# EAGLE board RHC12-BTA (EAGLE 7.5.0)
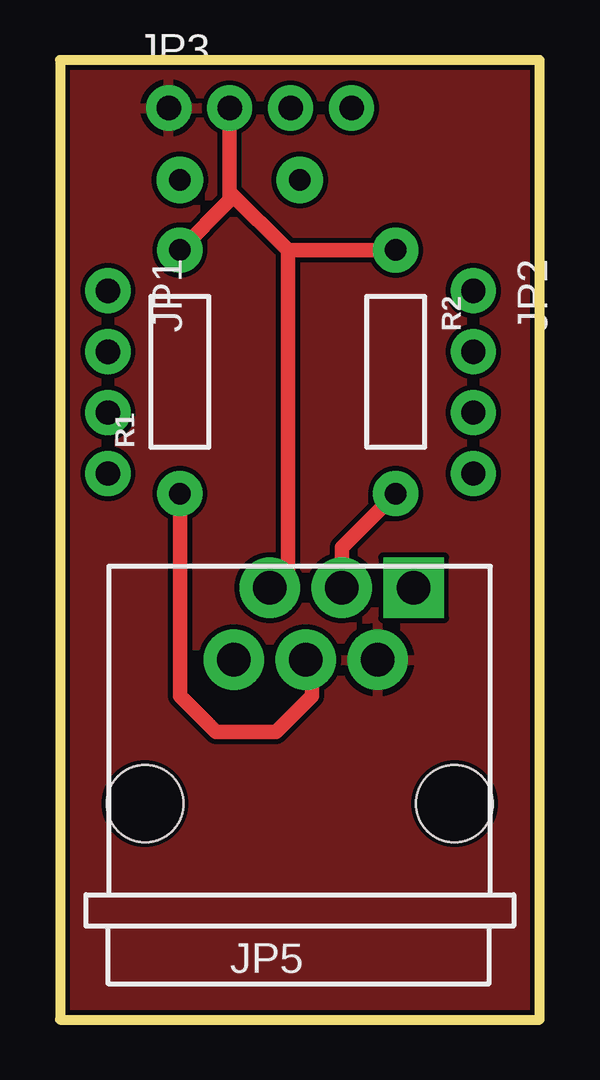
[diagram p0: board, top side]
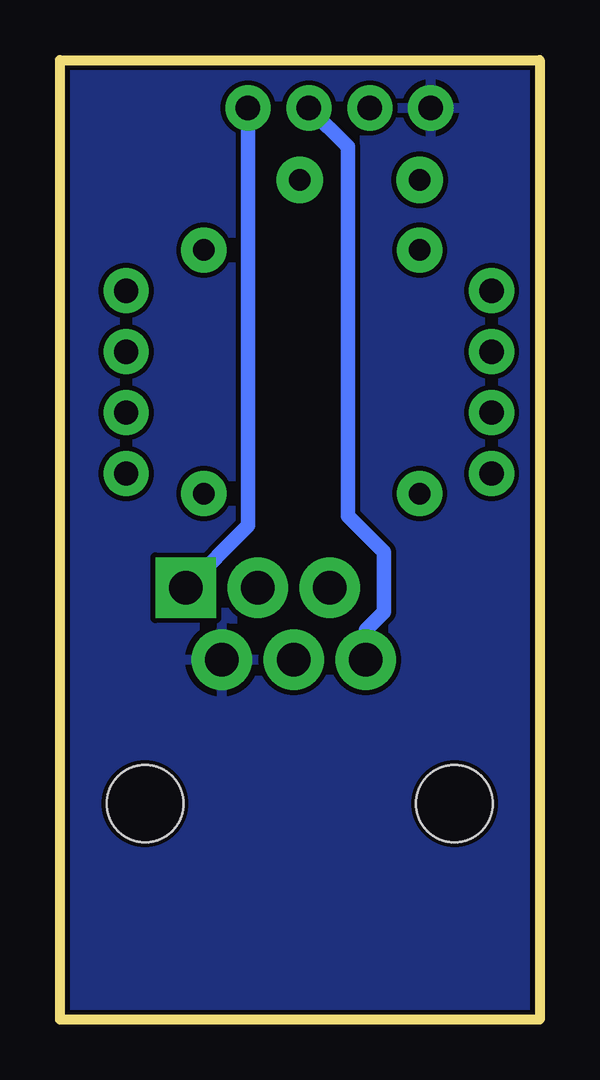
[diagram p1: board, bottom side, seen from below]

Size 20 x 40 mm. Coordinates in mm from the lower left corner, seen from the top.
Outline: 0,0 20,0 20,40 0,40 0,0
Copper layers (1*16): Top 0.035mm / dielectric 1.5mm / Bottom 0.035mm
Design rules "SparkFun-2-layer *": minimum track width 10mil, minimum drill 15mil, track to track 8mil, track to pad 8mil, pad to pad 8mil, via to via 8mil, smd to smd 8mil, copper to edge 8mil, drill to drill 8mil, minimum pad ring 12mil, minimum via ring 10mil, stop-mask expansion 4mil, vias tented up to drill 20mil, thermal gap 10mil

## Footprints (pad centres in the part's own frame; a part is rotated, then mirrored left to right if it is on the bottom)
1X04_NO_SILK_ALL_ROUND = drill 1.016 pad 1.88: 1 0,0; 2 2.54,0; 3 5.08,0; 4 7.62,0
BTA = drill 1.4 pad 2.54 square: 1 4.75,9 | drill 1.4 pad 2.54: 2 3.25,6; 3 1.75,9; 4 0.25,6; 5 -1.25,9; 6 -2.75,6 | hole 3.2: 6.45,0; -6.45,0
AXIAL-0.4 = drill 0.9 pad 1.88: P$1 -5.08,0; P$2 5.08,0

## Placement (x,y rotation side)
JP1  [1X04_NO_SILK_ALL_ROUND]  2,30.38 270 top
JP2  [1X04_NO_SILK_ALL_ROUND]  17.24,30.38 270 top
JP3  [1X04_NO_SILK_ALL_ROUND]  4.54,38 0 top
JP5  BTA  [BTA]  10,9 0 top
R1  [AXIAL-0.4]  5,27 90 top
R2  [AXIAL-0.4]  14,27 270 top

## Library data of the parts
JP1-JP3 JP5 = SparkFun-Connectors
R1 R2 = SparkFun-Passives

## Nets
5V: JP3.2 JP5.5 R1.P$2 R2.P$1
GND: JP3.1 JP5.2
N$1: JP5.4 R1.P$1
N$3: JP5.3 R2.P$2
S1: JP3.3 JP5.6
S2: JP3.4 JP5.1

## Tracks (layer width: path | path; a pad name or v marks a point on that pad's centre or on a via)
5V
  Top 0.61: JP3.2 7.08,34.5 | 7.08,34.5 7.08,34.16 R1.P$2 | R2.P$1 9.5,32.08 | 9.5,32.08 7.08,34.5 | 9.5,32.08 9.5,18.75 JP5.5
GND
  pour Top: 0,0 20,0 20,40 0,40
  pour Bottom: 0,0 20,0 20,40 0,40
N$1
  Top 0.61: R1.P$1 5,13.5 6.5,12 9,12 10.5,13.5 10.5,14.75 JP5.4
N$3
  Top 0.61: JP5.3 11.75,19.67 R2.P$2
N$5  (via drill 0.9 pad 1.93)
  other vias: 5,35
N$6  (via drill 0.9 pad 1.93)
  other vias: 10,35
S1
  Bottom 0.61: JP5.6 7.25,16.25 6.5,17 6.5,19.5 8,21 8,36.38 JP3.3
S2
  Bottom 0.61: JP3.4 12.16,20.59 JP5.1